# Altium PCB DashDAP.PcbDoc
Units mil, origin at the board's own origin, x right, y up, seen from the top; angles counter-clockwise.
Board outline 610 x 1383 mil, 2 copper layers (Top Layer, Bottom Layer); 30 components, 25 nets, 119 pads, 29 vias.
Unrouted connection lines stored in the file: 1.
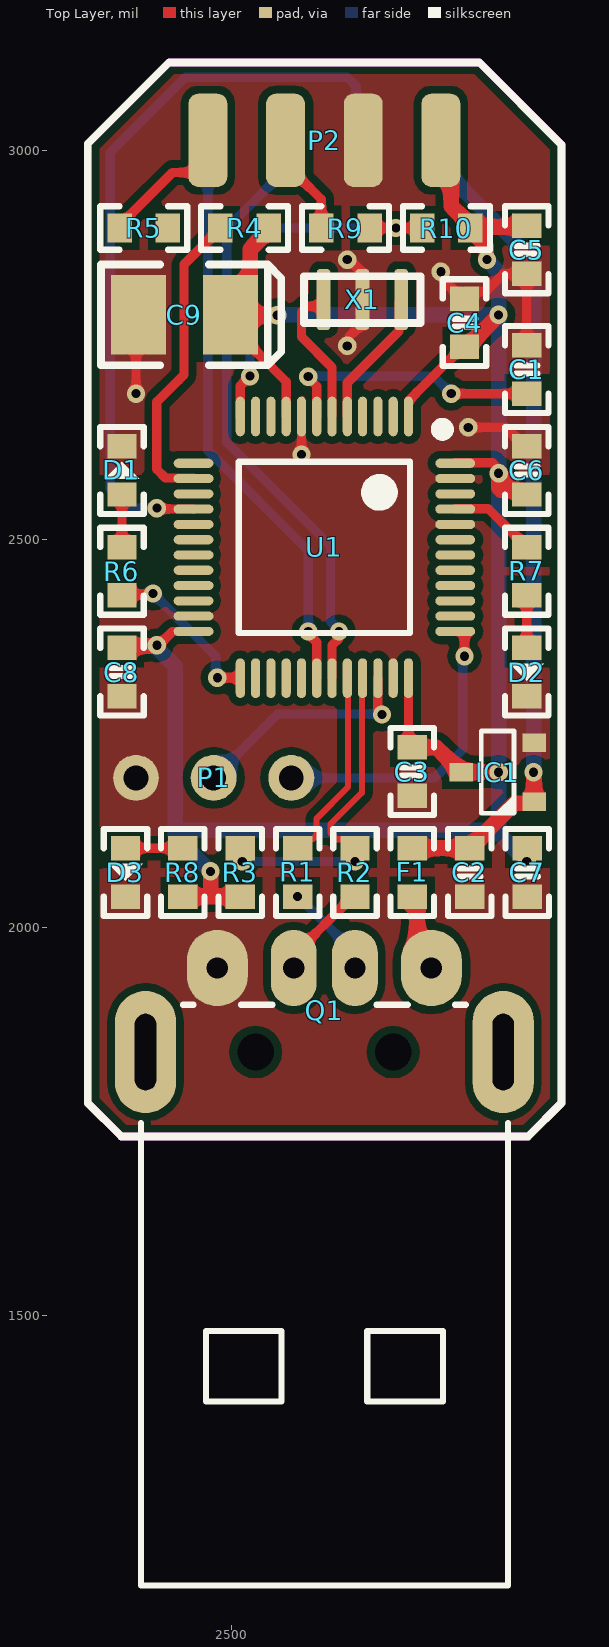
[diagram p0: Top Layer view]
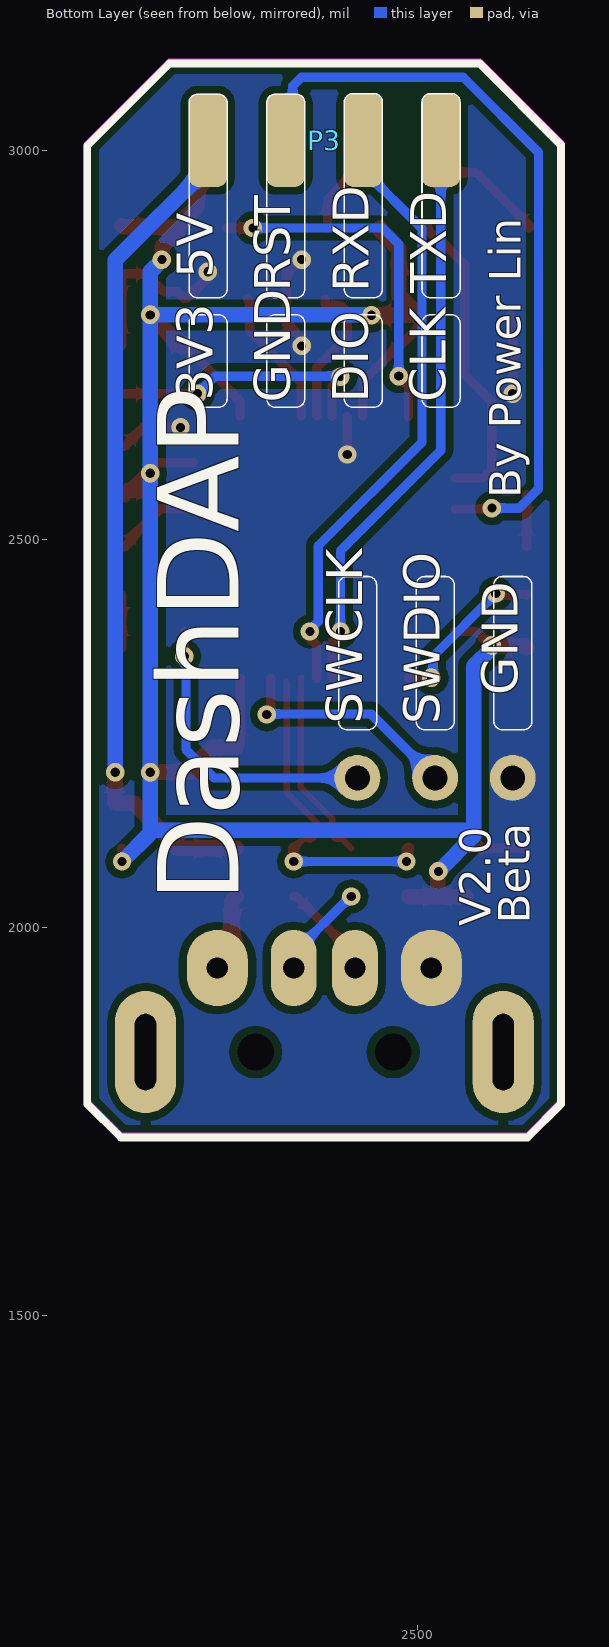
[diagram p1: Bottom Layer view, seen from below]

## Layer stack, top to bottom
Top Solder: solder mask 0.4, Solder Resist, Dk 3.5
Top Layer: signal copper 1.4
Dielectric 1: dielectric 12.6, FR-4, Dk 4.8
Bottom Layer: signal copper 1.4
Bottom Solder: solder mask 0.4, Solder Resist, Dk 3.5

## Board outline
2315,1774 2358,1731 2882,1731 2925,1774 2925,3008 2819,3114 2420,3114 2315,3009

## Design rules (kind name [scope] priority, off if disabled: settings)
Clearance [All] p1: gap=10 ignorepadtopadclearanceinfootprint=TRUE except(0: Arc-Arc Arc-Track Arc-SMDPad Arc-Hole Track-Track Track-SMDPad Track-Hole SMDPad-SMDPad SMDPad-Hole THPad-Hole Via-Hole Fill-Hole Poly-Hole Region-Hole Text-Hole)
DiffPairsRouting [All] p1: maxlimit=10 minlimit=10 mostfreqgap=10 toplayer_minwidth=15 toplayer_maxwidth=15 toplayer_prefwidth=15 bottomlayer_minwidth=15 bottomlayer_maxwidth=15 bottomlayer_prefwidth=15 maxuncoupledlength=500
PlaneConnect [All] p1: planeconnectstyle=Direct reliefexpansion=20 reliefentries=4 reliefconductorwidth=10 reliefairgap=10
PolygonConnect [All] p1: connectstyle=Direct reliefconductorwidth=10 reliefentries=4 polygonreliefangle="90 Angle" airgapwidth=10
RoutingVias [All] p1: holewidth=11.81 width=11.81 viastyle="Through Hole" minholewidth=11.81 minwidth=23.62 maxholewidth=11.81 maxwidth=23.62
SolderMaskExpansion [All] p1: expansion=4 istentingtop=FALSE
Width [All] p1: maxlimit=50 minlimit=12 preferedwidth=12
28 further rules are at their usual default settings.

## Classes and differential pairs
component class U_Power: C2 C3 C4 C5 C6 C7 C8 C9 D3 IC1 R8
component class U_MCU: C1 U1 X1
component class U_Dev: D1 D2 F1 P1 P2 P3 R1 R2 R3 R4 R5 R6 R7 R9 R10
differential pair USB: +USB_P -USB_N

## Components (designator, comment, footprint, x,y, rotation, side; value= is the part's Value field where it differs from the comment)
C1 "100nF" CAP-0603 2880.34,2718.55 r90 top
C2 "1uF" CAP-0603 2806.84,2071 r90 top
C3 "1uF" CAP-0603 2732.95,2200.88 r90 top
C4 "100nF" CAP-0603 2800.14,2778.8 r270 top
C5 "100nF" CAP-0603 2880.34,2872.73 r90 top
C6 "100nF" CAP-0603 2880.34,2588.66 r270 top
C7 "100nF" CAP-0603 2880.72,2071 r90 top
C8 "100nF" CAP-0603 2359.06,2328.89 r90 top
C9 "10uF" CASE-B_3528 2439.49,2788.82 r0 top
D1 "RED" LED-0603 2359.06,2588.66 r90 top
D2 "GREEN" LED-0603 2880.34,2328.89 r270 top
D3 "RED" LED-0603 2363.53,2071 r270 top
F1 "Fuse" R-0603 2732.95,2071 r90 top
IC1 "ME6211A33M3G-N" SOT-23-3 2842.9,2199.95 r0 top
P1 "HDR1x3_2.54" HDR1X3_2.54_180 2577.12,2192.58 r270 top
P2 "HDR1x4_2.54" HDR1X4_2.54_180H 2469.7,3013.68 r90 top locked
P3 "HDR1x4_2.54" HDR1X4_2.54_180H 2769.7,3013.67 r90 bottom locked
Q1 "USB A" USB_A(M)_DIP 2619.7,1731.31 r0 top
R1 "22R" R-0603 2585.19,2071 r90 top
R2 "22R" R-0603 2659.07,2071 r90 top
R3 "1.5K" R-0603 2511.3,2071 r90 top
R4 "1R" R-0603 2516.94,2900.73 r0 top
R5 "22R" R-0603 2387.06,2900.73 r180 top
R6 "10K" R-0603 2359.06,2458.78 r270 top
R7 "10K" R-0603 2880.34,2458.78 r90 top
R8 "10K" R-0603 2437.42,2071 r270 top
R9 "22R" R-0603 2646.83,2900.73 r180 top
R10 "1R" R-0603 2776.71,2900.73 r180 top
U1 "STM32F103C8T6" LQFP_48 2619.7,2489.52 r180 top locked
X1 "8MHz" CSTCE_G(A)村田晶振 2668.61,2808.57 r0 top

## Footprints (in the part's own frame and the unit in brackets; to place one, negate y for a bottom-side part, rotate by r counter-clockwise, add the part's x,y. Pads: shape width x height; smd on the part's side, far side on the other; paste and mask are expansions set on the pad)
CAP-0603 [mm]
  rect 0.8x0.96 smd: 1(-0.79,0) 2(0.79,0)
  silkscreen extent -1.42,-0.71 1.42,0.71, body extent -0.76,-0.39 0.76,0.39, height 0.9
CASE-B_3528 [mm]
  rect 1.8x2.6 smd: 1(1.5,0) 2(-1.5,0)
  silkscreen extent -2.73,-1.65 3.16,1.65, body extent -1.85,-1.47 1.85,1.46, height 2.03
CSTCE_G(A)村田晶振 [mm]
  rrect50% 0.45x2 smd: 1(1.27,0) 2(0,0) 3(-1.27,0)
  silkscreen extent -1.91,-0.76 1.91,0.76, body extent -1.9,-0.8 1.9,0.8, height 1
HDR1X3_2.54_180 [mm]
  round 1.5 hole 0.813: 1(0,0) 2(0,-2.54) 3(0,-5.08)
  body extent -1.25,-6.35 1.25,1.27, height 8.2
HDR1X4_2.54_180H [mil]
  rrect50% 120x50 smd: 1(0,0) 2(0,-100) 3(0,-200) 4(0,-300)
  body extent -35,-350 406,50, height 61
LED-0603 [mm]
  rect 0.8x0.96 smd: 1(-0.79,0) 2(0.79,0)
  silkscreen extent -1.42,-0.71 1.42,0.71, body extent -0.81,-0.4 0.81,0.4, height 0.6
LQFP_48 [mm]
  oval 0.3x1.3 smd: 1(-2.75,-4.28) 2(-2.25,-4.28) 3(-1.75,-4.28) 4(-1.25,-4.28) 5(-0.75,-4.28) 6(-0.25,-4.28) 7(0.25,-4.28) 8(0.75,-4.28) 9(1.25,-4.28) 10(1.75,-4.28) 11(2.25,-4.28) 12(2.75,-4.28) 25(2.75,4.28) 26(2.25,4.28) 27(1.75,4.28) 28(1.25,4.28) 29(0.75,4.28) 30(0.25,4.28) 31(-0.25,4.28) 32(-0.75,4.28) 33(-1.25,4.28) 34(-1.75,4.28) 35(-2.25,4.28) 36(-2.75,4.28)
  oval 1.3x0.3 smd: 13(4.28,-2.75) 14(4.28,-2.25) 15(4.28,-1.75) 16(4.28,-1.25) 17(4.28,-0.75) 18(4.28,-0.25) 19(4.28,0.25) 20(4.28,0.75) 21(4.28,1.25) 22(4.28,1.75) 23(4.28,2.25) 24(4.28,2.75) 37(-4.28,2.75) 38(-4.28,2.25) 39(-4.28,1.75) 40(-4.28,1.25) 41(-4.28,0.75) 42(-4.28,0.25) 43(-4.28,-0.25) 44(-4.28,-0.75) 45(-4.28,-1.25) 46(-4.28,-1.75) 47(-4.28,-2.25) 48(-4.28,-2.75)
  silkscreen extent -3.98,-3.99 2.8,2.8, body extent -4.5,-4.5 4.5,4.5, height 1.52
R-0603 [mm]
  rect 0.8x0.96 smd: 1(-0.79,0) 2(0.79,0)
  silkscreen extent -1.42,-0.71 1.42,0.71, body extent -0.76,-0.38 0.76,0.38, height 0.41
SOT-23-3 [mil]
  rect 30x24 smd: 1(47,-38) 2(47,38) 3(-47,0)
  silkscreen extent -21,-53 21,53, body extent -55,-57 55,57, height 51
USB_A(M)_DIP [mm]
  oval 2x4 hole 0.7 slot 2.5 at 90 deg: 0(-5.85,2.75) 0(5.85,2.75)
  round 0.2 hole 1.2: 0(-2.25,2.75) 0(2.25,2.75)
  oval 2x2.5 hole 0.7: 1(3.5,5.5) 4(-3.5,5.5)
  oval 1.5x2.5 hole 0.7: 2(1,5.5) 3(-1,5.5)
  silkscreen extent -6,-14.7 6,4.3, body extent -6.3,-14.5 6.3,5.42, height 4.5

## Part data
C1 C2 C3 C4 C5 C6 C7 C8: library part CAP, "贴片电容", Package=0402, SuppliersPartNumber=C52923, ComponentLink1Description=供应商链接, ComponentLink1URL=http://www.szlcsc.com/product/details_53938.html, Supplier=LC
C9: library part CAP-POL, "贴片电容-有极性", Package=3528, SuppliersPartNumber=C16133, ComponentLink1Description=供应商链接, ComponentLink1URL=http://www.szlcsc.com/product/details_16815.html, Supplier=LC
D1 D2 D3: library part LED, "发光二极管", Package=0603, SuppliersPartNumber=C2290, ComponentLink1Description=供应商链接, ComponentLink1URL=http://www.szlcsc.com/product/details_2663.html, Supplier=LC
F1: "6V 500mA 保险丝"
IC1: "线性稳压", Manufacturer_Name=Nexperia, Manufacturer_Part_Number=SI2302DS, Mouser Part Number=N/A, RS Part Number=7983053P, Datasheet Link=https://assets.nexperia.com/documents/data-sheet/SI2302DS.pdf, Height=1.1mm, Mouser Price/Stock=https://www.mouser.com/Search/Refine.aspx?Keyword=N%2FA, RS Price/Stock=http://uk.rs-online.com/web/p/products/7983053P
P1 P2 P3: "Header"
Q1: "USB 接口"
R1 R2 R3 R4 R5 R6 R7 R8 R9 R10: library part RES, "贴片电阻", Package=0805, SuppliersPartNumber=C17798, Supplier=LC
U1: library part STM32F103Cx, "单片机", I/Os (High Current)=37, Operating Frequency(F) (Processor speed) (MHz)=24, PartNumber=STM32F100C8T6B, Supplier Part Number 1=497-10499-ND, Supply Voltage(Vcc) min (V)=2, A/D Converter="1x12-bit (10 Channel)", ComponentLink1Description="Manufacturer URL", ComponentLink1URL=http://www.st.com/web/en/home.html, ComponentLink2Description=Datasheet, ComponentLink2URL=http://www.st.com/st-web-ui/static/active/en/resource/technical/document/datasheet/CD00251732.pdf, ComponentLink3Description="Package Specification", ComponentLink3URL=http://www.st.com/st-web-ui/static/active/en/resource/technical/document/datasheet/DM00058181.pdf, Core="ARM Cortex-M3", D/A Converter="2x12-bit (2 Channel)", DatasheetVersion="Rev. 7", FLASH Size (Prog) (kB)=64, Internal RAM Size (kB)=8, Mounting Technology="Surface Mount", PackageDescription="48-Pin Low Profile Quad Flat Package, 7 x 7 mm Body, 0.5 mm Pitch", PackageReference=LQFP48, PackageVersion="Rev. 6, 06/2013", Packing=Tray, Supplier 1=Digi-Key, Supplier 2=Farnell, Supplier 3=Newark, Supplier 4=Mouser, Supplier Part Number 2=1838511, Supplier Part Number 3=76R0988, Supplier Part Number 4=511-STM32F100C8T6B
X1: library part XTAL, "有源晶振"

## Via types
v1: diameter 23.62, hole 11.81, Top Layer to Bottom Layer, 29 vias

## Nets (pads, with @x,y where several pads share a name; then routed paths per layer and width w, separated by ;. In a path a pad name is that pad's centre, name@x,y a point inside that pad or via, vN(x,y) a via of type N, cw(c..) or ccw(c..) an arc to the next point about the centre after c; other vN are vias at no path point)
3.3V: C3.2 C4.2 C5.2 C6.2 C7.2 C8.2 C9.1 IC1.3 P2.4 R3.1 R4.2 R8.2 R10.1 U1.1 U1.9 U1.24 U1.36 U1.48 | length 3200.4
  Top Layer w12: v1@2407.46,2364.57 2424.15,2381.26 U1.24 ; C9.1 2498.54,2773.07 2527.97,2743.64 2529.69,2743.64 2570.49,2702.84 U1.9@2570.49,2658.65 ; U1.36 2727.97,2236.97 C3.2 ; U1.1@2727.97,2658.65 2727.97,2678.15 2787.25,2737.43 2787.25,2737.95 2796.99,2747.7 C4.2 C4.2@2803.29,2747.7 ; U1.48@2788.2,2598.43 2836.33,2598.43 C6.2@2871.44,2563.31 ; v1@2843.97,2788.38 v1(2843.97,2788.82) ; C6.2@2877.19,2557.56 C6.2 ; v1(2880.34,2085) 2880.34,2101.72 C7.2
  Top Layer w20: C8.2 2361.75,2362.69 2403.31,2362.69 v1(2404,2363.38) ; R8.2 2474.36,2039.9 ; v1(2472.95,2072.25) 2473.64,2071.55 2473.64,2040.62 2474.36,2039.9 ; R3.1 2474.36,2039.9 ; R4.2 2548.05,2897.58 2523.97,2873.51 2523.97,2814.25 C9.1 2498.99,2788.38 v1(2559,2788.38) ; C3.2 2763.86,2231.99 2786.9,2208.95 2786.9,2205.95 2792.9,2199.95 IC1.3 ; P2.4 2783.16,3000.22 2783.16,2928.54 2807.82,2903.88 R10.1 ; IC1.3@2795.93,2199.97 v1(2844,2200) ; C4.2@2803.29,2747.7 v1@2843.97,2788.38 ; v1(2829,2860) 2828.31,2860.69 2828.31,2877.09 2807.82,2897.58 R10.1 ; v1(2844,2585) 2844,2565.98 2846.67,2563.31 2871.44,2563.31 C6.2@2877.19,2557.56 ; C5.2 2878.79,2902.28 2809.37,2902.28 R10.1
  Bottom Layer w20: v1(2404,2363.38) 2404,2360 2427.59,2336.41 2427.59,2117.6 v1(2472.95,2072.25) ; 2427.59,2125 2844,2125 ; v1(2559,2788.38) 2559.42,2788.79 2843.95,2788.79 2843.97,2844.4 2829,2859.38 v1(2829,2860) ; v1(2843.97,2788.82) v1(2844,2585) v1(2844,2200) 2844,2121.34 v1(2880.34,2085)
5V: C2.2 F1.2 IC1.1 P3.1 | length 1085.1
  Top Layer w20: F1.2 2809.99,2102.1 2815.74,2107.85 2815.74,2111 2864.68,2159.95 2887.9,2159.95 IC1.1 2889.45,2162.4 2889.45,2199.55 v1(2889,2200)
  Bottom Layer w20: P3.1 2769.7,2978.67 2889,2859.38 v1(2889,2200)
GND: C1.2 C2.1 C3.1 C4.1 C5.1 C6.1 C7.1 C8.1 C9.2 D1.2 D2.2 D3.2 IC1.2 P1.3 P2.3 Q1.4 U1.8 U1.23 U1.35 U1.44 U1.47 X1.2 | length 600.3
  Top Layer w12: v1(2377.12,2687.44) 2377.12,2785.51 C9.2 ; v1(2590.17,2609) U1.8 ; v1(2649.07,2749) 2651.29,2751.22 2651.29,2760.74 2668.61,2778.05 X1.2 2668.61,2843.31 2651.92,2860 v1(2649.07,2860) ; v1(2769.7,2844.4) 2771.93,2842.18 2771.93,2834.97 2796.99,2809.9 C4.1 2809.15,2818.91 2827.24,2818.91 2849.96,2841.63 C5.1 C1.2 ; v1(2805,2644) 2852.96,2644 2877.19,2619.76 C6.1
NetC1_1: C1.1 U1.7 | length 346.5
  Top Layer w12: v1(2599,2709.37) 2599,2707.83 2609.86,2696.97 U1.7 ; v1(2783.16,2687.44) C1.1
  Bottom Layer w12: v1@2599,2710 2760.6,2710 v1(2783.16,2687.44)
NetD1_A: D1.1 R6.1 | length 67.7
  Top Layer w12: R6.1 D1.1
NetD2_A: D2.1 R7.1 | length 67.7
  Top Layer w12: D2.1 R7.1
NetD3_A: D3.1 R8.1 | length 73.9
  Top Layer w12: D3.1 R8.1
NetF1_1: F1.1 Q1.1 | length 102.4
  Top Layer w20: F1.1 2733.25,2039.9 2739,2034.15 2739,1992.07 2757.5,1973.58 Q1.1
NetP1_1: P1.1 U1.37 | length 401.6
  Top Layer w12: U1.37 2800.05,2381.26 2800.14,2381.16 v1(2800.14,2349.37)
  Bottom Layer w12: P1.1 2761.58,2192.58 2797.92,2228.92 2797.92,2347.78 v1@2800.14,2350
NetP1_2: P1.2 U1.34 | length 299.8
  Top Layer w12: U1.34 2688.6,2279.77 2693.88,2274.48 v1(2693.88,2274.37)
  Bottom Layer w12: P1.2 2559.54,2275 v1@2693.88,2275
NetP2_1: P2.1 R5.2 | length 175.8
  Top Layer w12: R5.2 2355.96,2903.88 2424.26,2972.18 2451.2,2972.18 2469.7,2990.68 P2.1
NetP2_2: P2.2 R9.2 | length 132.9
  Top Layer w12: P2.2 2569.7,2982.19 2588.21,2963.69 2589.66,2963.69 2615.73,2937.63 R9.2
NetP3_2: P3.2 U1.16 | length 986.2
  Top Layer w12: v1(2404,2540) 2405.17,2538.83 2451.11,2538.83 U1.16
  Bottom Layer w12: v1(2404,2540) 2369,2540 2344,2565 2344,2998 2441,3095 2649.07,3095 2660.48,3083.59 2660.48,3022.89 P3.2
NetP3_3: P3.3 U1.31 | length 787.5
  Top Layer w12: U1.31 2629.54,2363.38 2638.43,2372.27 v1(2638.43,2381.16)
  Bottom Layer w12: P3.3 2569.7,2975.7 2494,2900 2494,2625 2627.53,2491.47 2627.53,2394 2638.43,2383.1 v1(2638.43,2381.16)
NetP3_4: P3.4 U1.30 | length 750.7
  Top Layer w12: v1(2599,2381.16) 2599,2378.02 2609.86,2367.16 U1.30
  Bottom Layer w12: P3.4 2469.7,2614.3 2599,2485 v1(2599,2381.16)
NetQ1_2: Q1.2 R1.1 | length 123.1
  Bottom Layer w12: v1(2585.19,2039.9) 2585.94,2039.9 2659.07,1966.77 Q1.2
NetQ1_3: Q1.3 R2.1 | length 126.5
  Top Layer w12: Q1.3 2580.33,1964.31 2655.92,2039.9 R2.1
NetR4_1: R4.1 R5.1 U1.14 | length 398.3
  Top Layer w12: U1.14@2451.2,2578.74 2451.11,2578.83 2415.17,2578.83 2404,2590 2404,2676.8 2431.97,2704.77 2439,2711.8 2439,2853.89 2472.94,2887.83 2476.09,2887.83 2485.84,2897.58 R4.1
NetR6_2: R6.2 U1.25 | length 213.7
  Top Layer w12: R6.2 2360.22,2428.84 2397.84,2428.84 v1(2399,2430) ; v1(2481.91,2321.66) 2511.34,2321.66 2511.43,2321.57 U1.25
  Bottom Layer w12: v1(2399,2430) 2479.68,2349.32 2479.68,2323.89 v1(2481.91,2321.66)
NetR7_2: R7.2 U1.45 | length 114.5
  Top Layer w12: U1.45@2788.2,2539.37 2830.85,2539.37 2867.44,2502.78 2867.44,2499.63 2877.19,2489.88 R7.2
NetR9_1: R9.1 R10.2 U1.12 | length 491.2
  Top Layer w12: U1.12 2511.43,2697.43 v1(2524,2710) ; R9.1 v1(2711.77,2900.73) R10.2
  Bottom Layer w12: v1(2524,2710) 2524,2880 2544.73,2900.73 v1(2711.77,2900.73)
NetU1_5: U1.5 X1.1 | length 178.7
  Top Layer w12: U1.5@2649.23,2658.65 2649.32,2658.75 2649.32,2701.64 2715.75,2768.07 2715.75,2805.71 X1.1
NetU1_6: U1.6 X1.3 | length 188.9
  Top Layer w12: X1.3 2618.61,2802.86 2615.75,2800 2597.2,2800 2590.17,2792.97 2590.17,2760.58 2629.54,2721.21 U1.6@2629.54,2658.65
USB_N: R1.2 U1.32 | length 251.4
  Top Layer w8: R1.2 2596.93,2113.85 2604.85,2113.85 2609.53,2118.54 2609.53,2140.32 2650.07,2180.85 2650.07,2298.44 2649.96,2298.55 2649.96,2320.93 U1.32@2649.23,2321.66
USB_P: R2.2 R3.2 U1.33 | length 430.8
  Top Layer w8: R2.2 2647.32,2113.85 2635.82,2113.85 2627.53,2122.13 2627.53,2132.86 2668.07,2173.4 2668.07,2298.44 2668.18,2298.55 2668.18,2315.3 U1.33@2668.61,2315.73
  Top Layer w15: R3.2 2512.65,2100.75 2512.65,2086.35 v1(2514,2085) ; v1(2659.07,2085) R2.2
  Bottom Layer w12: v1(2514,2085) v1(2659.07,2085)
pads on no net: Q1.0 U1.2 U1.3 U1.4 U1.10 U1.11 U1.13 U1.15 U1.17 U1.18 U1.19 U1.20 U1.21 U1.22 U1.26 U1.27 U1.28 U1.29 U1.38 U1.39 U1.40 U1.41 U1.42 U1.43 U1.46

## Polygon pours and split planes (outlines as drawn)
GND on Bottom Layer "GND_L02_P000" (solid, remove dead copper, pour order 0): 2210,3219 3010,3219 3010,1599 2190,1599 2190,3214
GND on Top Layer "GND_L01_P001" (solid, remove dead copper, pour order 1): 2185,3224 2185,3174 3035,3174 3035,1594 2210,1594

## Keep-outs
Keep-Out Layer:
  the board outline again, w10

## Silkscreen, mask and mechanical layers (free items; w line width, h text height)
Top Overlay:
  the board outline again, w10
Bottom Overlay:
  lines w2: 2352.47,2440.52 2352.47,2265.52 ccw(c2363.47,2265.52) 2363.47,2254.52 2390.47,2254.52 ccw(c2390.47,2265.52) 2401.47,2265.52 2401.47,2440.52 ; 2352.47,2441 cw(c2363.47,2441) 2363.47,2452 2390.47,2452 cw(c2390.47,2441) 2401.47,2441 ; 2444.98,2850 2444.98,3062.82 cw(c2455.98,3062.82) 2455.98,3073.82 2482.98,3073.82 cw(c2482.98,3062.82) 2493.98,3062.82 2493.98,2850 ; 2444.98,2919 2444.98,2822 ccw(c2455.98,2822) 2455.98,2811 2482.98,2811 ccw(c2482.98,2822) 2493.98,2822 2493.98,2919 ; 2452.47,2441 cw(c2463.47,2441) 2463.47,2452 2490.47,2452 cw(c2490.47,2441) 2501.47,2441 ; 2452.49,2440.52 2452.49,2265.52 ccw(c2463.49,2265.52) 2463.49,2254.52 2490.49,2254.52 ccw(c2490.49,2265.52) 2501.49,2265.52 2501.49,2440.52 ; 2544.98,2850 2544.98,3062.82 cw(c2555.98,3062.82) 2555.98,3073.82 2582.98,3073.82 cw(c2582.98,3062.82) 2593.98,3062.82 2593.98,2850 ; 2544.98,2919 2544.98,2822 ccw(c2555.98,2822) 2555.98,2811 2582.98,2811 ccw(c2582.98,2822) 2593.98,2822 2593.98,2919 ; 2552.49,2440.52 2552.49,2265.52 ccw(c2563.49,2265.52) 2563.49,2254.52 2590.49,2254.52 ccw(c2590.49,2265.52) 2601.49,2265.52 2601.49,2440.52 ; 2552.49,2441 cw(c2563.49,2441) 2563.49,2452 2590.49,2452 cw(c2590.49,2441) 2601.49,2441 ; 2645,2850 2645,3062.82 ; 2645,2919 2645,2822 ccw(c2656,2822) 2656,2811 2683,2811 ccw(c2683,2822) 2694,2822 2694,2919 ; 2645,3062 cw(c2656,3062) 2656,3073 2683,3073 cw(c2683,3062) 2694,3062 ; 2694,2850 2694,3062.82 ; 2745,2850 2745,3062.82 ; 2745,2919 2745,2822 ccw(c2756,2822) 2756,2811 2783,2811 ccw(c2783,2822) 2794,2822 2794,2919 ; 2745,3062 cw(c2756,3062) 2756,3073 2783,3073 cw(c2783,3062) 2794,3062 ; 2794,2850 2794,3062.82 ; 2444.98,2681 ccw(c2455.98,2681) 2455.98,2670 2482.98,2670 ccw(c2482.98,2681) 2493.98,2681 2493.98,2778 ccw(c2482.98,2778) 2482.98,2789 2455.98,2789 ccw(c2455.98,2778) 2444.98,2778 2444.98,2681 ; 2544.98,2681 ccw(c2555.98,2681) 2555.98,2670 2582.98,2670 ccw(c2582.98,2681) 2593.98,2681 2593.98,2778 ccw(c2582.98,2778) 2582.98,2789 2555.98,2789 ccw(c2555.98,2778) 2544.98,2778 2544.98,2681 ; 2645,2681 ccw(c2656,2681) 2656,2670 2683,2670 ccw(c2683,2681) 2694,2681 2694,2778 ccw(c2683,2778) 2683,2789 2656,2789 ccw(c2656,2778) 2645,2778 2645,2681 ; 2745,2681 ccw(c2756,2681) 2756,2670 2783,2670 ccw(c2783,2681) 2794,2681 2794,2778 ccw(c2783,2778) 2783,2789 2756,2789 ccw(c2756,2778) 2745,2778 2745,2681
  lines w10: 2315,1772.69 2358,1729.69 2882,1729.69 2925,1772.69 2925,3006.7 2819,3112.7 2420,3112.7 2315,3007.7 2315,1772.69
  text "5V" at 2748,2835.98 h80 r270
  text "RXD" at 2547.38,2818.22 h80 r270
  text "RST" at 2648,2818.44 h80 r270
  text "TXD" at 2447.38,2816.8 h80 r270
  text "3V3" at 2748,2678.28 h80 r270
  text "CLK" at 2447.9,2676.04 h80 r270
  text "DIO" at 2547.98,2675.9 h80 r270
  text "GND" at 2648,2675.48 h80 r270
  text "By Power Lin" at 2353.62,2552.45 h70 r270
  text "GND" at 2355.47,2299 h80 r270
  text "SWDIO" at 2455.49,2261.9 h80 r270
  text "SWCLK" at 2555.49,2262.32 h80 r270
  text "DashDAP" at 2695.35,2032.45 h180 r270
  text "Beta" at 2341.47,2004.96 h70 r270
  text "V2.0" at 2391.99,2001.56 h70 r270
Mechanical 1:
  the board outline again, w10